# Altium PCB BlackPill.PcbDoc (part 2 of 2)
Units mm, origin at the board's own origin, x right, y up, seen from the top; angles counter-clockwise.
Board outline 35 x 50 mm, 4 copper layers (Top Layer, Mid Layer 1, Mid Layer 2, Bottom Layer), stack 1.586 mm thick; 44 components, 52 nets, 225 pads, 204 vias.
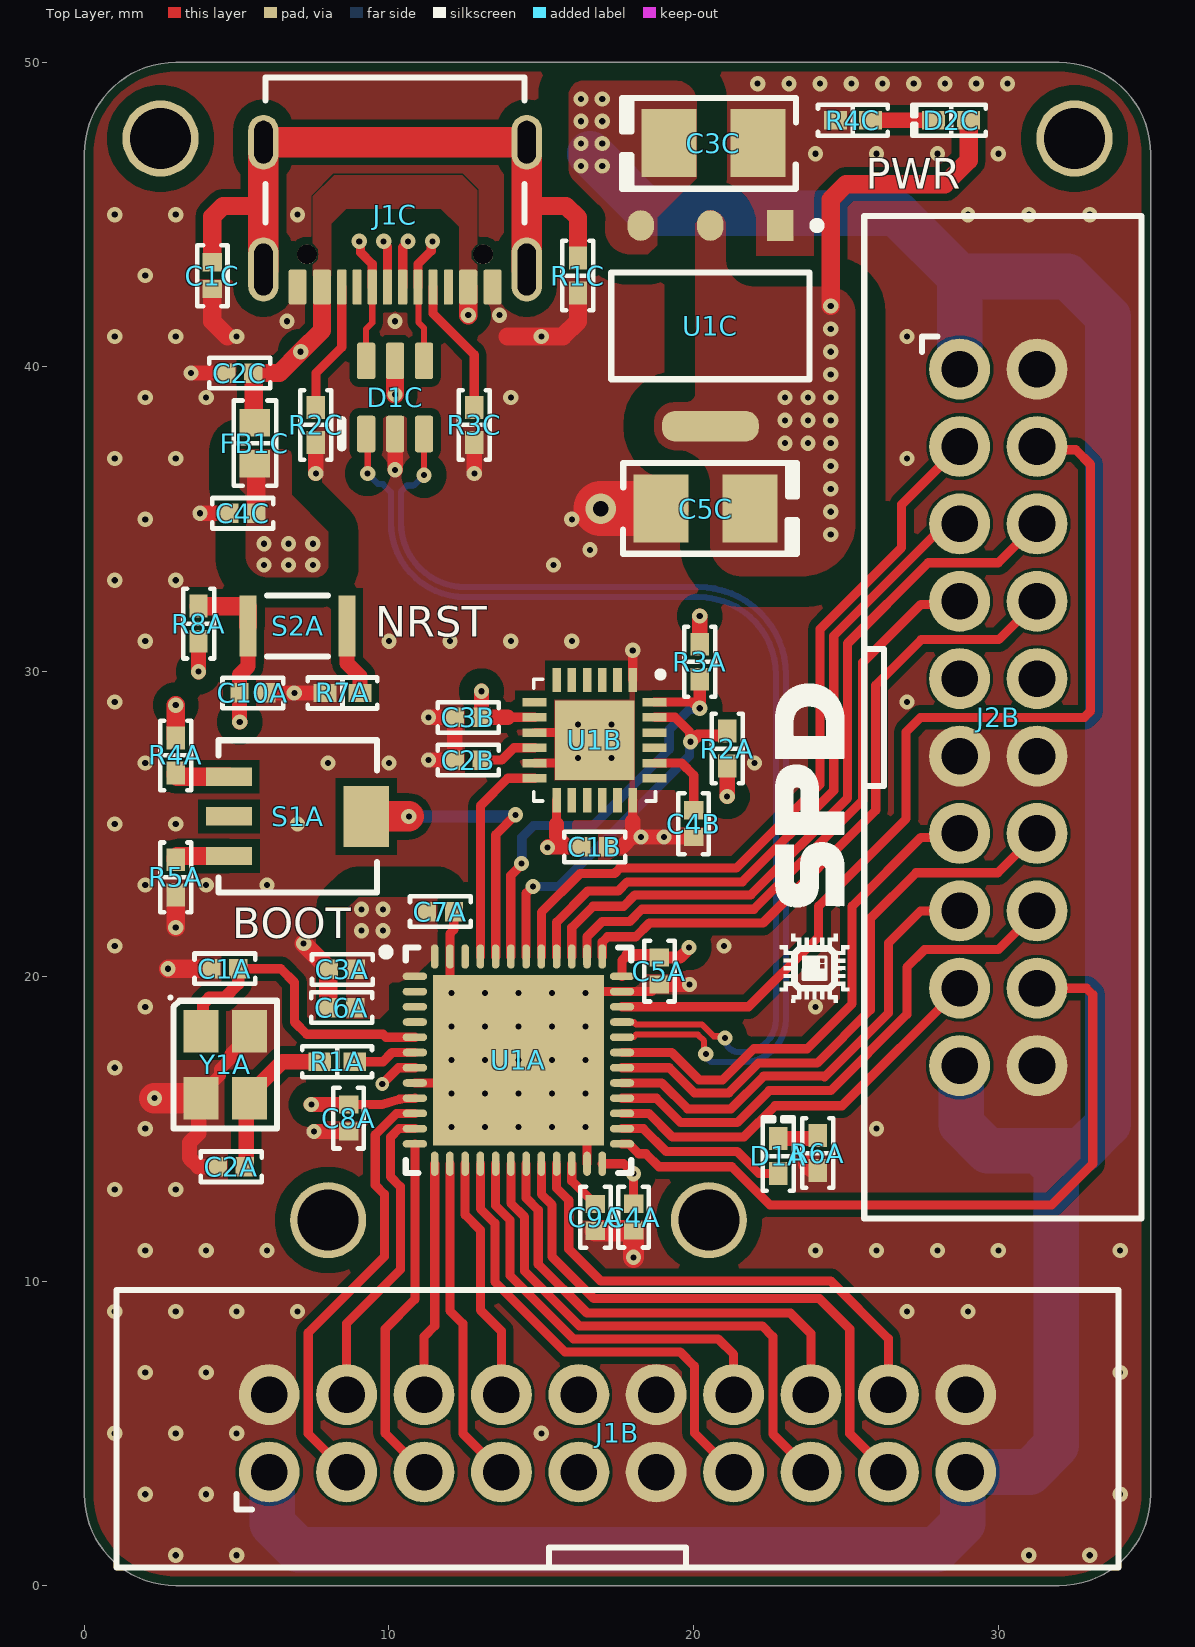
[diagram p0: Top Layer view]

## Via types
v1: diameter 0.5, hole 0.2, Top Layer to Bottom Layer, 203 vias
v2: diameter 0.45, hole 0.2, Top Layer to Bottom Layer, 1 vias

## Nets (pads, with @x,y where several pads share a name; then routed paths per layer and width w, separated by ;. In a path a pad name is that pad's centre, name@x,y a point inside that pad or via, vN(x,y) a via of type N, cw(c..) or ccw(c..) an arc to the next point about the centre after c; other vN are vias at no path point) (continued)
NetR5A_2: (continued)
  Top Layer w0.6: R5A.2 3,23.9 3.05,23.95 S1A.3
NetR7A_2: R7A.2 S2A.2 | length 2.4
  Top Layer w0.5: S2A.2 8.625,30.275 9.05,29.85 R7A.2
TVS_D_N: D1C.3 U1A.32 | length 37
  Top Layer w0.202: v1(11.15,36.45) D1C.3 ; U1A.32 17.659,18.009 18.04,18.009 18.116,18.085 20.14,18.085 20.343,17.882 20.343,17.507 v1(20.4,17.45)
  Bottom Layer w0.202: v1(11.15,36.45) 10.807,36.107 10.585,36.107 10.39,35.912 10.39,34.9 ccw(c12.515,34.9) 12.515,32.775 20.16,32.775 cw(c20.16,29.906) 23.029,29.906 23.029,18.589 cw(c21.625,18.589) 21.625,17.185 20.665,17.185 cw(c20.665,17.45) v1(20.4,17.45)
TVS_D_P: D1C.1 U1A.33 | length 35.9
  Top Layer w0.202: v1(9.3,36.5) D1C.1@9.3,37.446 ; U1A.33 17.659,18.491 18.04,18.491 18.116,18.415 20.276,18.415 20.659,18.032 20.968,18.032 v1(21.025,17.975)
  Bottom Layer w0.202: v1(9.3,36.5) 9.643,36.157 9.794,36.157 10.06,35.891 10.06,34.9 ccw(c12.515,34.9) 12.515,32.446 20.16,32.446 cw(c20.16,29.906) 22.7,29.906 22.7,18.589 cw(c21.625,18.589) 21.625,17.514 21.486,17.514 cw(c21.486,17.975) v1(21.025,17.975)
USB_D_N: D1C.4 J1C.A7 J1C.B7 | length 8.6
  Top Layer w0.202: J1C.A7 J1C.A7@9.999,42.574 ; J1C.B7 10.964,42.608 10.964,41.464 11.15,41.278 D1C.4
  Top Layer w0.3: v1(9.825,44.125) 9.825,44.071 9.95,43.946 J1C.A7 ; J1C.B7 10.95,43.375 11.387,43.812 11.387,44.087 v1(11.425,44.125)
  Mid Layer 2 w0.3: v1(9.825,44.125) 9.863,44.163 9.863,44.613 10.125,44.875 11.175,44.875 11.405,44.645 11.405,44.145 v1(11.425,44.125)
USB_D_P: D1C.6 J1C.A6 J1C.B6 | length 8.6
  Top Layer w0.202: D1C.6 9.25,41.25 9.45,41.45 J1C.B6 ; J1C.A6@10.401,42.574 J1C.A6
  Top Layer w0.3: v1(9.025,44.125) 9.063,44.087 9.063,43.762 9.45,43.375 J1C.B6 ; J1C.A6 10.45,43.932 10.625,44.107 v1(10.625,44.125)
  Mid Layer 1 w0.3: v1(9.025,44.125) 9.063,44.087 9.063,43.662 9.375,43.35 10.325,43.35 10.625,43.65 v1(10.625,44.125)
VBUS: C2C.2 D1C.5 FB1C.1 J1C.A4B9 J1C.B4A9 | length 16.4
  Top Layer w0.55: C2C.2 C2C.2@5.565,39.775 ; FB1C.1@5.565,38.21 FB1C.1
  Top Layer w0.6: C2C.2 6.4,39.8 v1(7.1,40.5) 7.8,41.2 J1C.B4A9 ; FB1C.1@5.565,38.21 C2C.2@5.565,39.775 ; v1(10.2,39.1) D1C.5 ; v1(12.6,41.7) J1C.A4B9
  Mid Layer 1 w0.6: v1(7.1,40.5) 8.8,40.5 v1(10.2,39.1) 12.249,39.1 12.6,39.451 v1(12.6,41.7)
pads on no net: J1C.A8 J1C.B8 J1C.MH S1A.2 U1A.2 U1A.3 U1A.4 U1A.46 U1B.2 U1B.3 U1B.4 U1B.5 U1B.6 U1B.7 U1B.14 U1B.15 U1B.16 U1B.17 U1B.19 U1B.21 U1B.22

## Polygon pours and split planes (outlines as drawn)
GND on Top Layer "TOP GND" (solid, remove dead copper, pour order 8): 0,3 0,47 cw(c3,47) 3,50 32,50 cw(c32,47) 35,47 35,3 cw(c32,3) 32,0 3,0 cw(c3,3)
GND on Top Layer "NONET_L01_P-001" (solid, pour order 7): 21.25,46 ccw(c21.75,46) 21.75,45.5 cw(c21.75,45) 22.25,45 22.25,44.25 ccw(c22.5,44.25) 22.5,44 23.25,44 ccw(c23.25,44.25) 23.5,44.25 23.5,46.75 cw(c24,46.75) 24,47.25 24.75,47.25 ccw(c24.75,47.75) 25.25,47.75 25.25,48.75 ccw(c25,48.75) 25,49 21.5,49 ccw(c21.5,48.75) 21.25,48.75
+3V3 on Top Layer "NONET_L01_P-001" (solid, pour order 6): 20.05,44.675 cw(c20.525,44.675) 20.525,45.15 cw(c20.525,44.625) 21.05,44.625 21.05,43.571 ccw(c21.98,43.571) 21.98,42.641 24.434,42.641 cw(c24.434,41.775) 25.3,41.775 25.3,34.9 cw(c23.525,34.9) 23.525,33.125 21.6,33.125 cw(c21.6,34.175) 20.55,34.175 20.55,36.15 ccw(c19.425,36.15) 19.425,37.275 cw(c19.425,38) 18.7,38 18.7,38.15 cw(c19.4,38.15) 19.4,38.85 19.775,38.85 ccw(c19.775,39.125) 20.05,39.125
+5V on Top Layer "NONET_L01_P-001" (solid, pour order 5): 20.1,46.2 18.8,44.9 18.8,44 18.5,43.7 17.9,43.7 cw(c17.9,44.5) 17.1,44.5 17.1,44.759 ccw(c16.567,44.879) 16.859,45.341 16.071,46.129 cw(c16.483,46.541) 15.9,46.541 15.9,48.9 cw(c16.4,48.9) 16.4,49.4 19.4,49.4 cw(c19.4,48.7) 20.1,48.7
+5V on Top Layer "5V VBUS" (solid, pour order 4): 5.1,37.3 6.6,37.3 cw(c6.6,37.1) 6.8,37.1 6.8,35.8 8,34.6 8,33.5 cw(c7.6,33.5) 7.6,33.1 6,33.1 cw(c6,33.8) 5.3,33.8 5.3,35.8 5.1,36 5.1,36.4
VBUS on Top Layer "VBUS" (solid, pour order 3): 7.5,42.1 8.1,42.1 8.1,44.7 8.6,45.2 11.7,45.2 12.3,44.6 12.3,42 12.9,42 12.9,43.357 12.708,43.55 12.708,43.808 12.9,44 12.9,45.8 12.4,46.3 8.2,46.3 7.5,45.6 7.5,44.055 7.684,43.87 7.684,43.537 7.5,43.353
+3V3 on Top Layer "3V3" (solid, pour order 0): 8.6,22.21 8.6,18.6 9.7,18.6 10,18.9 10,19.7 10.1,19.8 11.249,19.8 11.3,19.851 11.3,20.1 11.4,20.2 11.6,20.2 11.7,20.3 11.7,22.5 11.6,22.6 9.01,22.6
+3V3 on Mid Layer 1 "MID 3V3" (solid, remove dead copper, pour order 9): 0,3 0,47 cw(c3,47) 3,50 32,50 cw(c32,47) 35,47 35,3 cw(c32,3) 32,0 3,0 cw(c3,3)
GND on Bottom Layer "BOT GND" (solid, remove dead copper, pour order 10): 0,3 0,47 cw(c3,47) 3,50 32,50 cw(c32,47) 35,47 35,3 cw(c32,3) 32,0 3,0 cw(c3,3)
GND on Mid Layer 2 "MID2 GND" (solid, remove dead copper, pour order 11): 0,3 0,47 cw(c3,47) 3,50 32,50 cw(c32,47) 35,47 35,3 cw(c32,3) 32,0 3,0 cw(c3,3)

## Other copper
Top Layer:
  pour cut-out: 10.85,20 11.5,20.65 17,20.65 17.65,20 17.65,14.5 16.437,13.288 12.063,13.288 10.85,14.5
  pour cut-out: 11.196,20.304 17.171,20.304 17.65,19.825 17.65,14.5 17,13.85 11.5,13.85 10.85,14.5 10.85,20

## Silkscreen, mask and mechanical layers (free items; w line width, h text height)
Top Overlay:
  drawing of 5 lines, arcs and shapes, not listed
  text "PWR" at 25.65,45.85 h1
  text "NRST" at 9.55,31.15 h1
  text "BOOT" at 4.85,21.25 h1
Bottom Overlay:
  text "GND" at 30.75,41.55 h0.9 r270
  text "+5V" at 27.15,39.45 h0.9
  text "PB5" at 22.55,36.95 h0.9
  text "PA13" at 27.15,36.95 h0.9
  text "PB4" at 22.55,34.35 h0.9
  text "PB3" at 27.15,34.35 h0.9
  text "PA15" at 22.55,31.95 h0.9
  text "PA14" at 27.15,31.95 h0.9
  text "+3V3" at 27.15,29.25 h0.9
  text "GND" at 27.15,26.75 h0.9
  text "PA10" at 22.55,24.15 h0.9
  text "PA9" at 27.15,24.15 h0.9
  text "PA8" at 22.55,21.65 h0.9
  text "PB15" at 27.15,21.65 h0.9
  text "PB14" at 22.55,19.15 h0.9
  text "PB12" at 27.15,19.15 h0.9
  text "+5V" at 27.15,16.65 h0.9
  text "GND" at 31.85,15.25 h0.9 r90
  text "PA1" at 8.25,13.85 h0.9 r270
  text "PA7" at 20.75,13.85 h0.9 r270
  text "PA3" at 10.75,11.85 h0.9 r270
  text "PA5" at 13.25,11.85 h0.9 r270
  text "PB1" at 23.25,11.85 h0.9 r270
  text "PB10" at 25.85,11.85 h0.9 r270
  text "PA0" at 8.25,7.85 h0.9 r270
  text "PA2" at 10.75,7.85 h0.9 r270
  text "PA4" at 13.25,7.85 h0.9 r270
  text "GND" at 18.05,7.85 h0.9 r270
  text "PA6" at 20.75,7.85 h0.9 r270
  text "PB0" at 23.25,7.85 h0.9 r270
  text "PB2" at 25.85,7.85 h0.9 r270
  text "+3V3" at 15.65,7.75 h0.9 r270
  text "GND" at 30.55,6.65 h0.9 r180
  text "GND" at 4.575,5.75 h0.9
  text "+5V" at 30.55,4.15 h0.9 r180
  text "+5V" at 4.575,3.375 h0.9
Mechanical 1:
  the board outline again, w0.254